# Altium PCB PCB1.PcbDoc
Units mil, origin at the board's own origin, x right, y up, seen from the top; angles counter-clockwise.
Board outline 2000 x 3550 mil, 2 copper layers (Top Layer, Bottom Layer); 26 components, 24 nets, 81 pads, 2 vias.
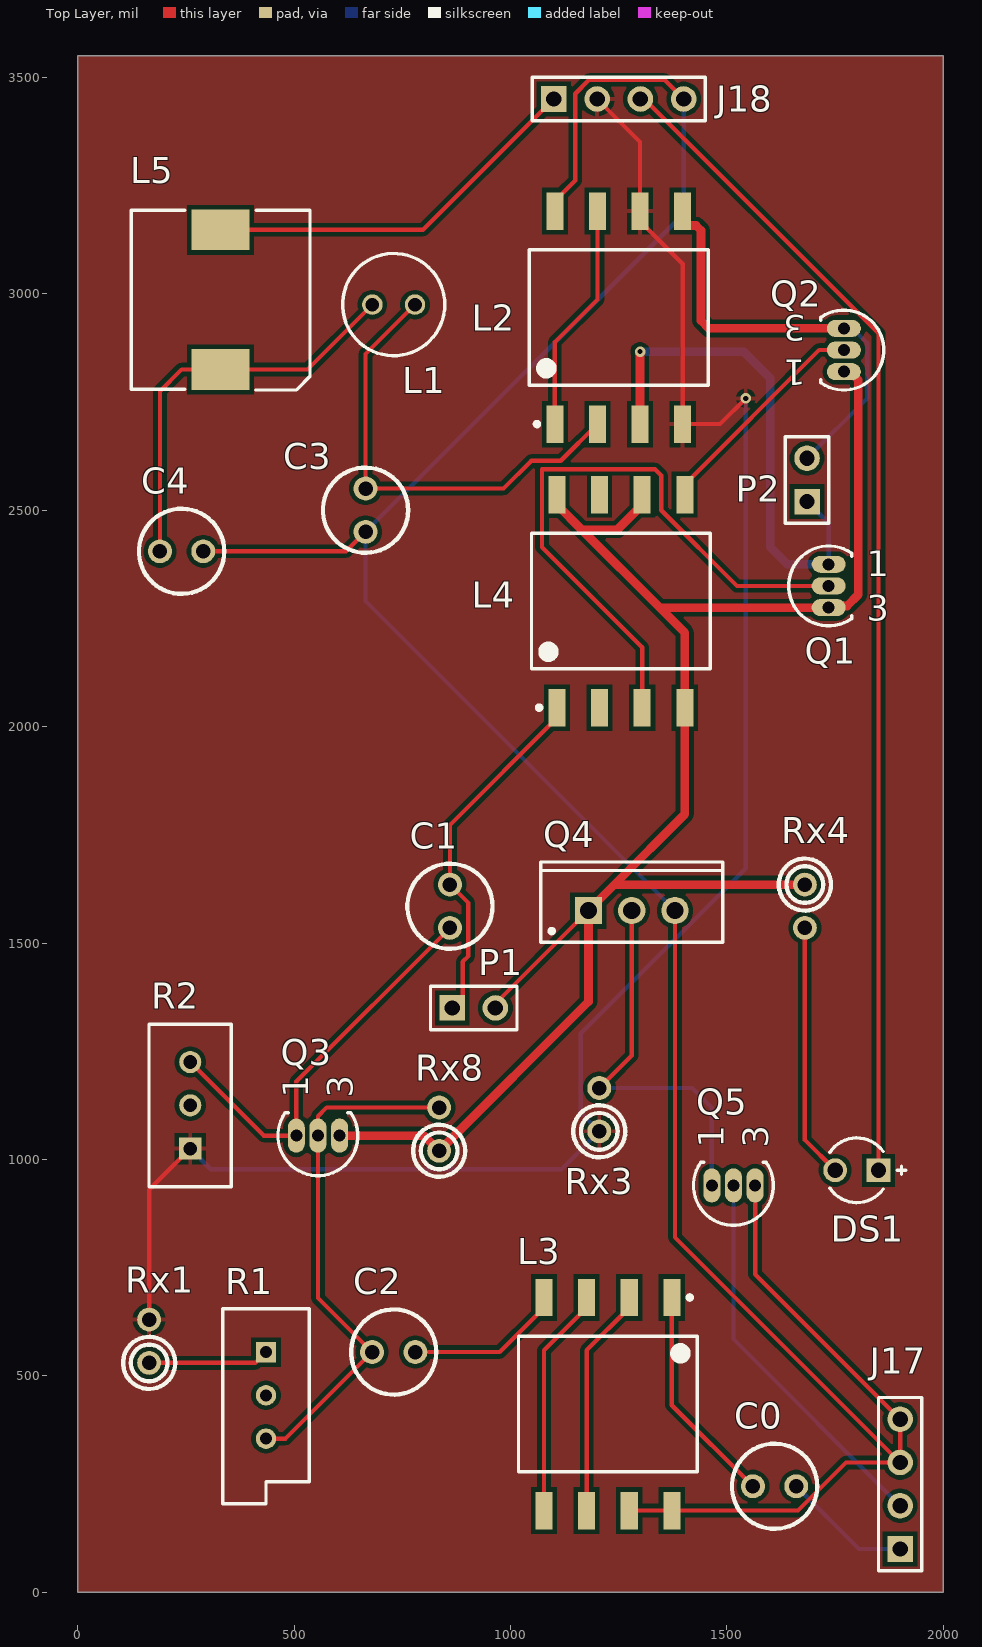
[diagram p0: Top Layer view]
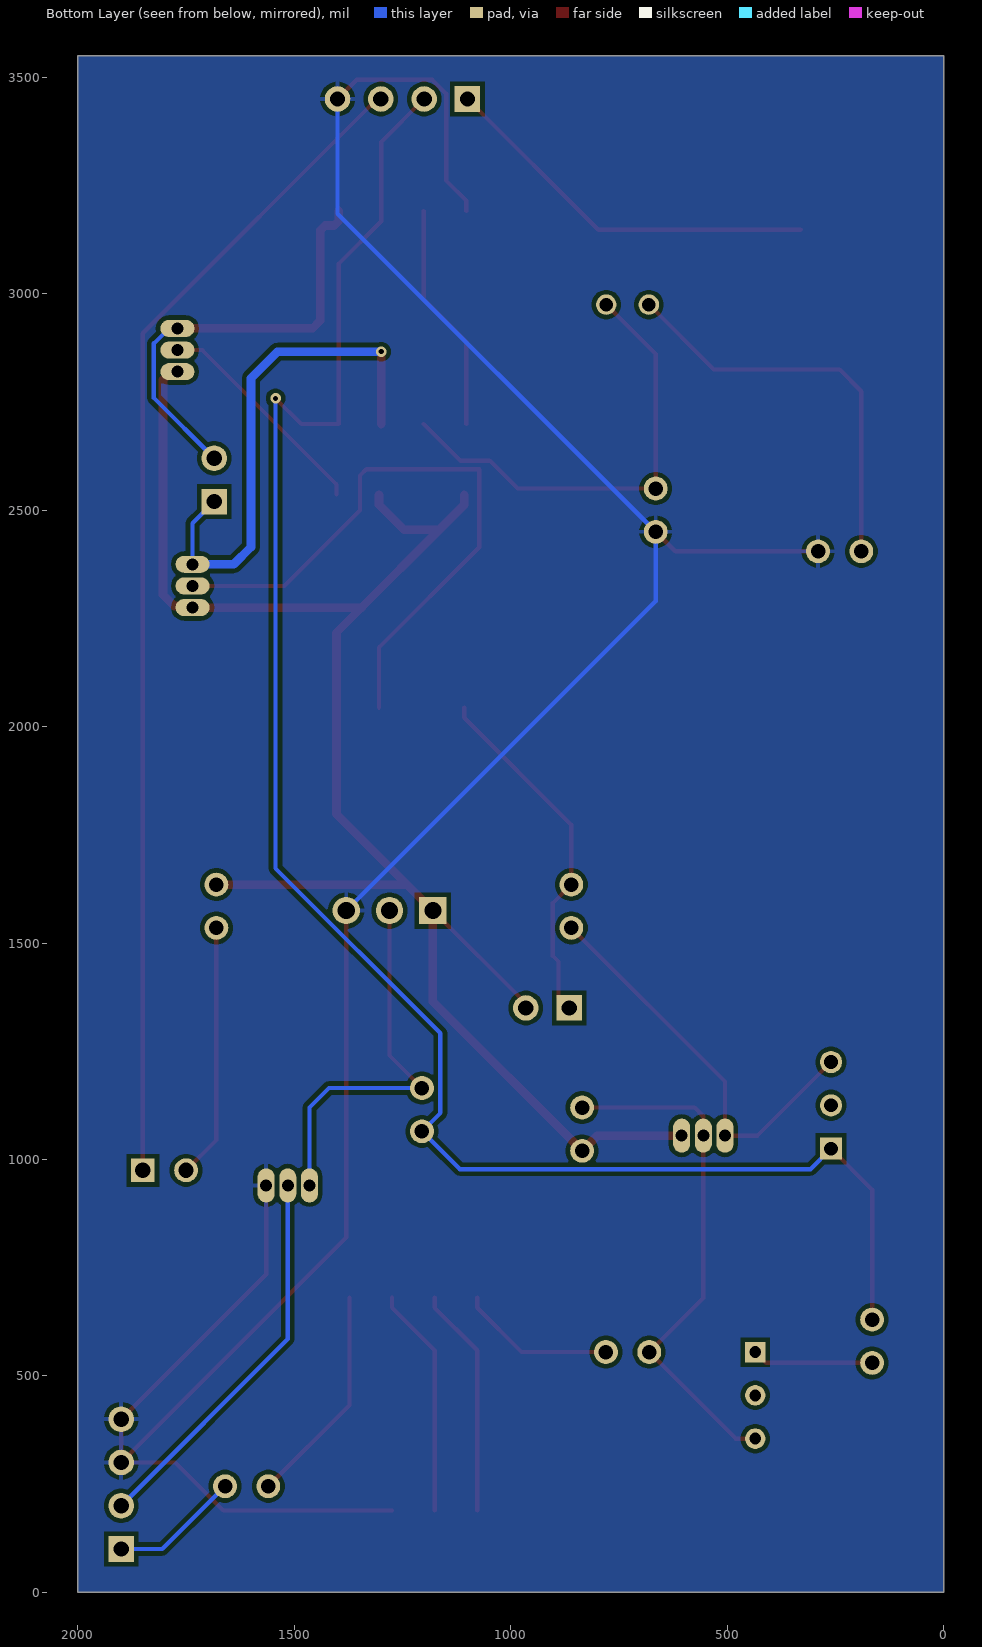
[diagram p1: Bottom Layer view, seen from below]

## Layer stack, top to bottom
Top Solder: solder mask 0.4, Solder Resist, Dk 3.5
Top Layer: signal copper 1.4
Dielectric 1: dielectric 12.6, FR-4, Dk 4.8
Bottom Layer: signal copper 1.4
Bottom Solder: solder mask 0.4, Solder Resist, Dk 3.5

## Board outline
0,0 0,3550 2000,3550 2000,0

## Design rules (kind name [scope] priority, off if disabled: settings)
Clearance [All] p1: gap=10 ignorepadtopadclearanceinfootprint=FALSE except(0: Arc-Hole Track-Hole SMDPad-Hole THPad-Hole Via-Hole Fill-Hole Poly-Hole Region-Hole Text-Hole)
HoleSize [All] p1: absolutevalues=TRUE maxlimit=900 minlimit=12 maxpercent=80.000 minpercent=20.000
MinimumSolderMaskSliver [All] p1: minsoldermaskwidth=1
PolygonConnect [All] p1: connectstyle=Relief reliefconductorwidth=10 reliefentries=4 polygonreliefangle="90 Angle" airgapwidth=10
RoutingVias [All] p1: holewidth=12 width=24 viastyle="Through Hole" minholewidth=12 minwidth=24 maxholewidth=100 maxwidth=200
SilkToSilkClearance [All] p1: silktosilkclearance=0
SilkToSolderMaskClearance [IsPad] p1: minsilkscreentomaskgap=1 clearancetoexposedcopper=TRUE
SolderMaskExpansion [All] p1: expansion=4 istentingtop=FALSE
Width [All] p1: maxlimit=200 minlimit=10 preferedwidth=10
26 further rules are at their usual default settings.

## Components (designator, comment, footprint, x,y, rotation, side; value= is the part's Value field where it differs from the comment)
C0 "Cap" RADIAL-0.1 1610,245 r180 top value=2.2UF
C1 "Cap" RADIAL-0.1 860,1585 r90 top value=2.2UF
C2 "Cap" RADIAL-0.1 730,555 r180 top value=2.2UF
C3 "Cap" RADIAL-0.1 665,2500 r90 top value=220PF
C4 "Cap" RADIAL-0.1 240,2405 r180 top value=220PF
DS1 "LTL-1CHE" INDPR60-254-520X380X650 1800,975 r180 top
J17 "Header 4" HDR1X4 1900,100 r90 top
J18 "Header 4" HDR1X4 1100,3450 r0 top
L1 "7447462010" WE-TI-XS 730,2975 r180 top
L2 "744205" WE-SL 1250,2945 r90 top
L3 "744205" WE-SL 1225,435 r270 top
L4 "744205" WE-SL 1255,2290 r90 top
L5 "7447797050" WE-PDF-1045 330,2986.42 r90 top
P1 "Header 2" HDR1X2 865,1350 r0 top
P2 "Header 2" HDR1X2 1685,2520 r90 top
Q1 "BS170" TO-92 1735,2325 r0 top
Q2 "BS170" TO-92 1770,2870 r180 top
Q3 "BS170" TO-92 555,1055 r90 top
Q4 "IRF510" TO-220AB 1280,1575 r0 top
Q5 "BS170" TO-92 1515,940 r90 top
R1 "RPot" VR5 435,455 r270 top value=10K
R2 "3296W-1-102LF" BOUR-3296W-1-3 260,1125 r90 top
Rx1 "Res1" AXIAL-0.1-RES 165,580 r90 top value=390K
Rx3 "Res1" AXIAL-0.1-RES 1205,1115 r90 top value=100K
Rx4 "Res1" AXIAL-0.1-RES 1680,1585 r270 top value=330
Rx8 "Res1" AXIAL-0.1-RES 835,1070 r90 top value=100K

## Footprints (in the part's own frame and the unit in brackets; to place one, negate y for a bottom-side part, rotate by r counter-clockwise, add the part's x,y. Pads: shape width x height; smd on the part's side, far side on the other; paste and mask are expansions set on the pad)
AXIAL-0.1-RES [mm] "Axial Device, Thru-Hole; 2 Leads; 0.3 in Pin Spacing"
  round 1.4 hole 0.85: 1(-1.27,0) 2(1.27,0)
  silkscreen extent -2.8,-1.53 0.26,1.53
BOUR-3296W-1-3 [mm] "THD, 3-Leads, Body 9.53x4.83mm, Pitch 2.54mm"
  rect 1.3x1.3 hole 0.8: 1(-2.54,0)
  round 1.3 hole 0.8: 2(0,0) 3(2.54,0)
  silkscreen extent -4.76,-2.41 4.76,2.42, body extent -4.76,-2.41 4.76,2.42, height 11.55
HDR1X2 [mm] "Connector; Header; 2 Position"
  rect 1.5x1.5 hole 0.9: 1(0,0)
  round 1.5 hole 0.9: 2(2.54,0)
  silkscreen extent -1.27,-1.27 3.81,1.27
HDR1X4 [mm] "Connector; Header; 4 Position"
  rect 1.5x1.5 hole 0.9: 1(0,0)
  round 1.5 hole 0.9: 2(2.54,0) 3(5.08,0) 4(7.62,0)
  silkscreen extent -1.27,-1.27 8.89,1.27
INDPR60-254-520X380X650 [mm] "THD, 2-Leads, Dia 3.8mm, Pitch 2.54mm"
  rect 1.4x1.4 hole 0.9: 1(-1.27,0)
  round 1.4 hole 0.9: 2(1.27,0)
  silkscreen extent -2.87,-1.9 1.58,1.9, body extent -1.9,-1.9 1.9,1.9, height 6.5
RADIAL-0.1 [mm] "Axial Device, Thru-Hole; 2 Leads; 0.3 in Pin Spacing"
  round 1.4 hole 0.85: 1(-1.27,0) 2(1.27,0)
  silkscreen extent -2.5,-2.5 2.5,2.5
TO-92 [mm] "TO, Flat Index; 3 In-Line, Axial Leads; Body Dia. 4.6mm; Leads 0.41 x 0.39 mm (max)"
  oval 2x1 hole 0.7: 1(0,1.27) 2(0,0) 3(0,-1.27)
  silkscreen extent -2.34,-2.34 1.35,2.34
TO-220AB [mm] "TO, Thru-Hole, Vertical, Heatsink Mounted; 3 In-Line Leads; Pitch 2.54 mm"
  rect 1.6x1.6 hole 1: 1(-2.54,0)
  round 1.6 hole 1: 2(0,0) 3(2.54,0)
  silkscreen extent -5.35,-1.85 5.35,2.85, body extent -5.4,-1.9 5.4,2.9, height 19.3
VR5 [mm] "Thru-Hole; 3 Leads"
  rect 1.2x1.2 hole 0.7: 1(-2.54,0)
  round 1.2 hole 0.7: 2(0,0) 3(2.54,0)
  silkscreen extent -5.08,-2.54 6.35,2.54
WE-PDF-1045 [mm] "SMD Inductor, 2-Leads, Body 10.2 x 10.2 mm"
  rect 2.4x3.4 smd: 1(-4.1,0) 2(4.1,0)
  silkscreen extent -5.3,-5.25 5.25,5.25, body extent -5.1,-5.1 5.1,5.1, height 4.49
WE-SL [mm] "SMD Inductor, 8-Leads, Body 10.5 x 9.7 mm"
  rect 2.2x1 smd: 1(-6.25,3.75) 2(-6.25,1.25) 3(-6.25,-1.25) 4(-6.25,-3.75) 5(6.25,-3.75) 6(6.25,-1.25) 7(6.25,1.25) 8(6.25,3.75)
  silkscreen extent -6.37,-5.25 3.97,5.25, body extent -6.35,-5 6.35,5, height 5.88
WE-TI-XS [mm] "THT Inductor, 2-Leads, Body 6.0 x 6.0 mm"
  round 1.2 hole 0.8: 1(-1.25,0) 2(1.25,0)
  silkscreen extent -3,-3 3,3, body extent -2.44,-2.44 2.44,2.45, height 7.6

## Part data
C0 C1 C2: library part "CAP CER 2.2UF 50V Z5U RADIAL", "Capacitor", Manufacturer Part Number=C330C225M5U5TA7303, Voltage Rating=50V, LatestRevisionDate=17-Jul-2002, LatestRevisionNote="Re-released for DXP Platform.", Published=8-Jun-2000, Publisher="Altium Limited"
C3 C4: library part "CAP CER 220PF 50V X7R RADIAL", "Capacitor", Manufacturer Part Number=K221K15X7RF5TH5, Voltage Rating=50V, LatestRevisionDate=17-Jul-2002, LatestRevisionNote="Re-released for DXP Platform.", Published=8-Jun-2000, Publisher="Altium Limited"
DS1: library part CMP-1674-00005-1, "Radial LED, 12.6 mcd, 20 mA, 2 V, -55 to 100 degC, 2-Pin THD, RoHS, Bulk", Case\Package=Radial, Current Rating="3.6 A", Max Operating Temperature="130 degC", Min Operating Temperature="-40 degC", Package Quantity=55, Resistance="0.045 Ohm", Tolerance=20%, ComponentLink1Description="Manufacturer URL", ComponentLink1URL=http://www.us.liteon.com/, ComponentLink2Description=Datasheet, ComponentLink2URL=https://datasheet.ciiva.com/15117/getdatasheetpartid-187746-15117985.pdf, DatasheetVersion=Dec-03, Height="1.1 inch", Lead Pitch="11.44 mm", Length="0.97 inch", Mount="Through Hole", PackageDescription="2-Pin Through Hole Device, Dia 3.8 mm, Pitch 2.54 mm", PackageReference=LTL-1CHE, Packaging=Tray, Radiation Hardening=No, RoHSCompliant=true, Shielding=Unshielded, Width="0.62 inch"
J17 J18: "Header, 4-Pin", LatestRevisionDate=17-Jul-2002, LatestRevisionNote="Re-released for DXP Platform.", Publisher="Altium Limited"
L1: library part CMP-0225-00026-1, "Radial Leaded Wire Wound Inductor WE-TI, L = 1.00 µH", Inductance="1.00 ÂµH", ComponentLink1Description="Manufacturer Link", ComponentLink1URL=http://www.we-online.com, ComponentLink2Description=Datasheet, ComponentLink2URL=http://www.we-online.de/katalog/media/pdf/7447462010.pdf, DatasheetVersion="ver 2, Jan-2011", PackageDescription="THT Inductor, 2-Leads, Body 6.0 x 6.0 mm", PackageReference=WE-TI-XS, PackageVersion=2011
L2 L3 L4: library part CMP-0222-00030-1, "SMD Common Mode Line Filter WE-SL, L = 100 µH", Inductance="100 ÂµH", ComponentLink1Description="Manufacturer Link", ComponentLink1URL=http://www.we-online.com, ComponentLink2Description=Datasheet, ComponentLink2URL=http://www.we-online.de/katalog/media/pdf/744205.pdf, DatasheetVersion="ver 6, Dec-2010", PackageDescription="SMD Inductor, 8-Leads, Body 10.5 x 9.7 mm", PackageReference=WE-SL, PackageVersion=2010
L5: library part CMP-0227-00047-1, "SMD Power Inductor WE-PDF, L = 0.50 µH", Inductance="0.50 ÂµH", ComponentLink1Description="Manufacturer Link", ComponentLink1URL=http://www.we-online.com, ComponentLink2Description=Datasheet, ComponentLink2URL=http://www.we-online.de/katalog/media/pdf/7447797050.pdf, DatasheetVersion="ver 2, Jul-2009", PackageDescription="SMD Inductor, 2-Leads, Body 10.2 x 10.2 mm", PackageReference=WE-PDF-1045, PackageVersion=2009
P1 P2: "Header, 2-Pin", LatestRevisionDate=17-Jul-2002, LatestRevisionNote="Re-released for DXP Platform.", Publisher="Altium Limited"
Q1 Q2 Q3 Q4 Q5: library part MOSFET-N, "N-Channel MOSFET", LatestRevisionDate=17-Jul-2002, LatestRevisionNote="Re-released for DXP Platform.", PackageDescription="TO, Flat Index; 3 In-Line, Axial Leads; Body Dia. 4.6mm; Lead Dia. 0.5 mm (max)", PackageReference=E3, PackageVersion=1995/1996, Published=8-Jun-2000, Publisher="Altium Limited"
R1: "Potentiometer", Supplier Part Number 1=3296W-103LF-ND, LatestRevisionDate=17-Jul-2002, LatestRevisionNote="Re-released for DXP Platform.", PackageDescription="Variable Resistor, Thru-Hole; 3 Leads", PackageReference=VR5, Published=8-Jun-2000, Publisher="Altium Limited", Set Position=0.5, Sim Note="Enter the Resistance value and the set point into parameter fields.", Supplier 1=Digi-Key
R2: library part CMP-1747-00002-1, "Square Trimpot(R) Trimming Potentiometer, 1000 Ohm, -55 to 125 degC, 3-Pin THD, RoHS, Tube", Case Code (Imperial)=0603, Case Code (Metric)=1608, Max Operating Temperature="155 degC", Min Operating Temperature="-55 degC", Package Quantity=5000, Power Rating="100 mW", Resistance="4.7 kohm", Tolerance=1%, Voltage Rating="75 V", Case\Package=0603, ComponentLink1Description="Manufacturer URL", ComponentLink1URL=http://www.bourns.com/, ComponentLink2Description=Datasheet, ComponentLink2URL=http://www.bourns.com/docs/Product-Datasheets/3296.pdf, DatasheetVersion=May-16, Height="0.45 mm", Length="1.6 mm", Mount="Surface Mount", PackageDescription="3-Pin Through Hole Device, Body 9.53 x 4.83 mm, Pitch 2.54 mm", PackageReference=3296W-1-3, Packaging="Tape and Reel", Pins=2, Radiation Hardening=No, REACH SVHC=Yes, RoHSCompliant=true, Weight="7.1E-05 oz", Width="0.8 mm"
Rx1: library part "RES 390K OHM 5% 1/4W AXIAL", "Resistor", Manufacturer Part Number=CFR-25JB-52-390K, Power Rating=1/4W, Tolerance=0.05, LatestRevisionDate=17-Jul-2002, LatestRevisionNote="Re-released for DXP Platform.", Published=8-Jun-2000, Publisher="Altium Limited"
Rx3 Rx8: library part "RES 10K OHM 5% 1/4W AXIAL", "Resistor", Manufacturer Part Number=CFR-25JB-52-10K, Power Rating=1/4W, Tolerance=0.05, LatestRevisionDate=17-Jul-2002, LatestRevisionNote="Re-released for DXP Platform.", Published=8-Jun-2000, Publisher="Altium Limited"
Rx4: library part "RES 330 OHM 5% 1/4W AXIAL", "Resistor", Manufacturer Part Number=CFR-25JB-52-330R, Power Rating=1/4W, Tolerance=0.05, LatestRevisionDate=17-Jul-2002, LatestRevisionNote="Re-released for DXP Platform.", Published=8-Jun-2000, Publisher="Altium Limited"

## Via types
v1: diameter 24, hole 12, Top Layer to Bottom Layer, 2 vias

## Nets (pads, with @x,y where several pads share a name; then routed paths per layer and width w, separated by ;. In a path a pad name is that pad's centre, name@x,y a point inside that pad or via, vN(x,y) a via of type N, cw(c..) or ccw(c..) an arc to the next point about the centre after c; other vN are vias at no path point)
+5: DS1.1 J18.3 | length 2707.9
  Top Layer w10: J18.3 1308.74,3450 1850,2908.74 DS1.1
+12: J18.2 L2.4 L2.6 R2.1 Rx1.2 Rx3.1 | length 4307.1
  Top Layer w10: Rx1.2 165,930 R2.1 ; J18.2 1299.21,3350.79 L2.6 1299.21,3167.44 1397.64,3069.02 L2.4 1483.94,2698.94 v1(1543.28,2758.28)
  Bottom Layer w10: R2.1 307.56,977.44 1117.44,977.44 Rx3.1 1162.44,1107.56 1162.44,1291.68 1543.28,1672.53 v1(1543.28,2758.28)
/TXEN: J17.2 Q5.2 | length 899.5
  Bottom Layer w10: Q5.2 1515,585 J17.2
DVR_OUT: C1.2 L4.1 P1.1 | length 829.6
  Top Layer w10: P1.1 889.53,1374.53 889.53,1457.06 902.56,1470.09 902.56,1592.44 C1.2 860,1772.95 1107.36,2020.32 L4.1
GND: C3.1 C4.1 J17.3 J17.4 J18.4 L2.8 L3.7 L3.8 Q4.3 Q5.3 | length 6383.3
  Top Layer w10: C4.1 620,2405 C3.1 ; L2.8 1102.36,3214.69 1149.3,3261.63 1149.3,3462.27 1181.56,3494.53 1355.47,3494.53 J18.4 ; L3.7 L3.8 1664.12,188.94 1775.19,300 J17.3 ; Q4.3 1380,820 J17.3 ; Q5.3 1565,735 J17.4 J17.3
  Bottom Layer w10: Q4.3 665,2290 C3.1 1400,3185 J18.4
GND_SW: L4.4 L4.6 L4.8 P1.2 Q1.3 Q2.1 Q3.3 Q4.1 Rx4.1 Rx8.1 | length 4067.5
  Top Layer w10: P1.2 965,1360 Q4.1
  Top Layer w20: Q3.3 800,1055 Rx8.1 1180,1365 Q4.1 1240,1635 ; L4.8 1107.36,2512.44 1164.8,2455 ; L4.6 1304.21,2512.44 1246.77,2455 1164.8,2455 ; Rx4.1 1240,1635 ; Q2.1 1784.44,2820 1803.5,2800.94 1803.5,2304.78 1777.42,2278.71 1738.71,2278.71 Q1.3 1344.8,2275 ; 1164.8,2455 1344.8,2275 ; 1240,1635 1402.64,1797.64 L4.4 1402.64,2217.17 1344.8,2275
NetC0_2: C0.2 L3.1 | length 513.7
  Top Layer w10: L3.1 1372.64,432.36 C0.2
NetC1_1: C1.1 Q3.1 R2.3 | length 942.5
  Top Layer w10: R2.3 430,1055 Q3.1 505,1180 C1.1
NetC2_1: C2.1 L3.4 | length 363.4
  Top Layer w10: C2.1 974.92,555 1077.36,657.44 L3.4
NetC2_2: C2.2 Q3.2 R1.3 Rx8.2 | length 1212.9
  Top Layer w10: R1.3 480,355 C2.2 555,680 Q3.2 555,1100 575,1120 Rx8.2
NetC3_2: C3.2 L1.1 L2.2 | length 1069.8
  Top Layer w10: L1.1 665,2860.79 C3.2 983.72,2550 1048.09,2614.37 1116.22,2614.37 L2.2
NetC4_2: C4.2 L1.2 L5.1 | length 943.6
  Top Layer w10: C4.2 190,2775 240,2825 L5.1 530.79,2825 L1.2
NetDS1_2: DS1.2 Rx4.2 | length 589
  Top Layer w10: Rx4.2 1680,1045 DS1.2
NetL2_1: L2.1 L2.7 | length 532.9
  Top Layer w10: L2.1 1102.36,2888.44 1200.79,2986.87 L2.7
NetL2_3: L2.3 P2.1 Q1.1 | length 1200.8
  Top Layer w20: L2.3 v1(1299.21,2866.3)
  Bottom Layer w10: P2.1 1735,2470 Q1.1
  Bottom Layer w20: v1(1299.21,2866.3) 1538.7,2866.3 1600,2805 1600,2415 1640,2375 Q1.1
NetL2_5: L2.5 P2.2 Q2.3 | length 1012.1
  Top Layer w20: L2.5 1397.64,3167.44 1407.32,3157.76 1428.28,3157.76 1440,3146.04 1440,2938 1458,2920 Q2.3
  Bottom Layer w10: P2.2 1824.37,2759.37 1824.37,2885.31 1789.68,2920 Q2.3
NetL3_2: L3.2 L3.6 | length 532.9
  Top Layer w10: L3.6 1175.79,559.02 1274.21,657.44 L3.2
NetL3_3: L3.3 L3.5 | length 532.9
  Top Layer w10: L3.5 1077.36,559.02 1175.79,657.44 L3.3
NetL4_3: L4.3 Q1.2 | length 1467.1
  Top Layer w10: L4.3 1304.21,2183 1072.68,2414.54 1072.68,2594.37 1333.63,2594.37 1348,2580 1348,2500 1523,2325 Q1.2
NetL4_5: L4.5 Q2.2 | length 519.5
  Top Layer w10: L4.5 1402.64,2559.69 1712.95,2870 Q2.2
NetQ4_2: Q4.2 Q5.1 Rx3.2 | length 899.7
  Top Layer w10: Rx3.2 1280,1240 Q4.2
  Bottom Layer w10: Rx3.2 1420,1165 1465,1120 Q5.1
NetR1_1: R1.1 Rx1.1 | length 280.4
  Top Layer w10: Rx1.1 410,530 R1.1
PA_IN: C0.1 J17.1 | length 300.1
  Bottom Layer w10: C0.1 1805,100 J17.1
PA_OUT: J18.1 L5.2 | length 895.2
  Top Layer w10: L5.2 797.83,3147.83 J18.1
pads on no net: L4.2 L4.7 R1.2 R2.2

## Polygon pours and split planes (outlines as drawn)
+12 on Top Layer "+12_L01_P003" (solid, pour order 3): 0,3550 2000,3550 2000,0 0,0
GND on Bottom Layer "GND_L02_P002" (solid, pour order 2): 0,3550 2000,3550 2000,5 2005,0 0,0

## Text inside footprints (layer, text, board x,y; h text height)
Q1: Top Overlay "1" at 1822.56,2347.05 h59.05; Top Overlay "3" at 1822.56,2244.88 h59.05
Q2: Top Overlay "1" at 1682.44,2847.95 h59.05 r180; Top Overlay "3" at 1682.44,2950.12 h59.05 r180
Q3: Top Overlay "3" at 635.12,1142.56 h59.05 r90; Top Overlay "1" at 532.95,1142.56 h59.05 r90
Q5: Top Overlay "3" at 1595.12,1027.56 h59.05 r90; Top Overlay "1" at 1492.95,1027.56 h59.05 r90